# EAGLE board testv3 (EAGLE 6.3)
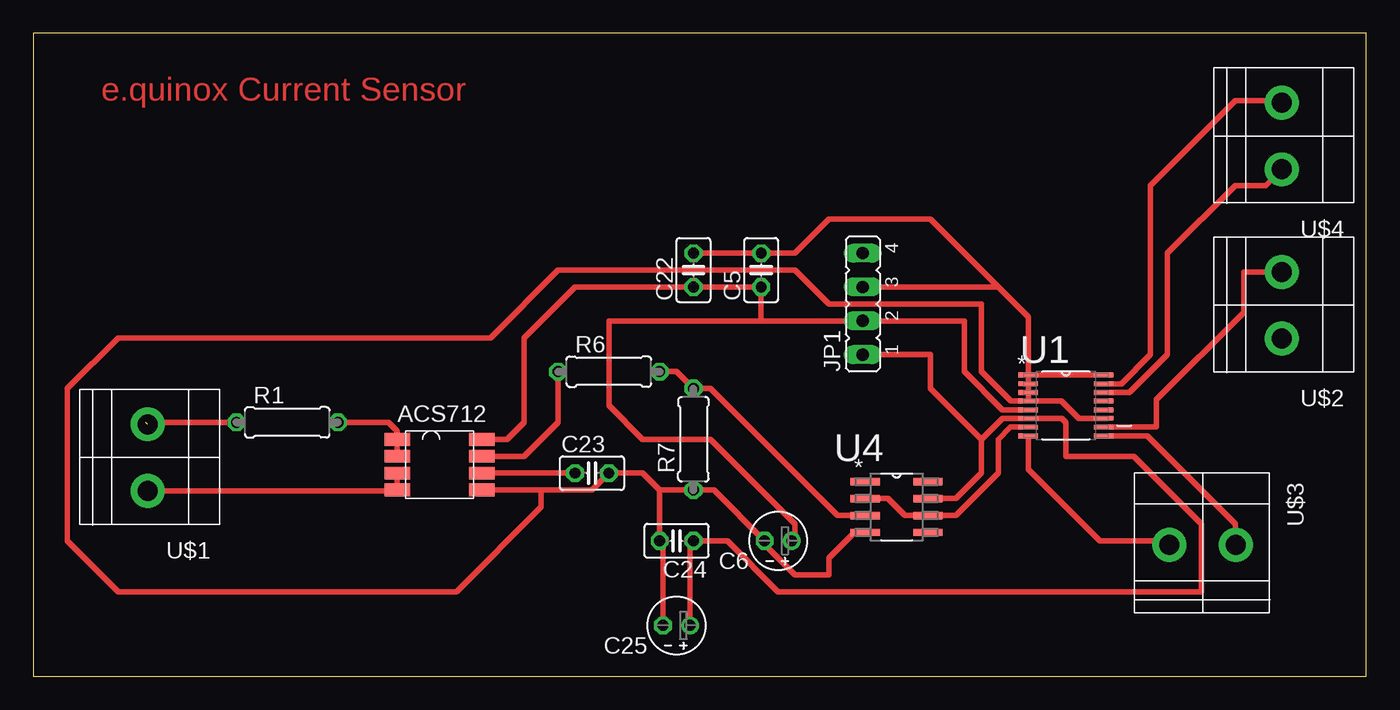
[diagram p0: board, top side]

Size 100 x 48.25 mm. Coordinates in mm from the lower left corner, seen from the top.
Outline: 0,0 100,0 100,48.25 0,48.25 0,0
Copper layers (1*16): Top 0.035mm / dielectric 1.5mm / Bottom 0.035mm
Design rules "default": minimum track width 10mil, minimum drill 24mil, track to track 8mil, track to pad 8mil, pad to pad 8mil, via to via 8mil, smd to smd 8mil, copper to edge 40mil, drill to drill 8mil, minimum pad ring 10mil, minimum via ring 8mil, stop-mask expansion 4mil, vias tented up to drill 0mil, thermal gap 10mil

## Footprints (pad centres in the part's own frame; a part is rotated, then mirrored left to right if it is on the bottom)
C025-025X050 = drill 0.813 octagon: 1 -1.27,0; 2 1.27,0
E2-4 = drill 0.813 pad 1.27: + -1.016,0 | drill 0.813 pad 1.27 octagon: - 1.016,0
JP4 = drill 0.914 long: 1 -3.81,0; 2 -1.27,0; 3 1.27,0; 4 3.81,0
0207/7 = drill 0.813 octagon: 1 -3.81,0; 2 3.81,0
SOP65P640X120-16N = smd 1.473 x 0.356: 1 -2.819,2.286; 2 -2.819,1.626; 3 -2.819,0.965; 4 -2.819,0.33; 5 -2.819,-0.33; 6 -2.819,-0.965; 7 -2.819,-1.626; 8 -2.819,-2.286; 9 2.819,-2.286; 10 2.819,-1.626; 11 2.819,-0.965; 12 2.819,-0.33; 13 2.819,0.33; 14 2.819,0.965; 15 2.819,1.626; 16 2.819,2.286
SOIC127P600X175-8N = smd 2.184 x 0.559: 1 -2.362,1.905; 2 -2.362,0.635; 3 -2.362,-0.635; 4 -2.362,-1.905; 5 2.362,-1.905; 6 2.362,-0.635; 7 2.362,0.635; 8 2.362,1.905
CTB1500-2 = drill 1.5 pad 2.54: P$1 2.481,5.396; P$2 7.481,5.396
SOIC8 = smd 1.93 x 0.965: 1 -4.445,1.27; 2 -4.445,0; 3 -4.445,-1.27; 4 -4.445,-2.54; 5 1.905,-2.54; 6 1.905,-1.27; 7 1.905,0; 8 1.905,1.27

## Placement (x,y rotation side)
C5  [C025-025X050]  54.61,30.48 90 top
C6  [E2-4]  55.88,10.16 180 top
C22  [C025-025X050]  49.53,30.48 90 top
C23  [C025-025X050]  41.91,15.24 0 top
C24  [C025-025X050]  48.26,10.16 180 top
C25  [E2-4]  48.26,3.81 180 top
JP1  [JP4]  62.23,27.94 90 top
R1  [0207/7]  19.05,19.05 0 top
R6  [0207/7]  43.18,22.86 0 top
R7  [0207/7]  49.53,17.78 90 top
U1  AD7993BRUZ-0  [SOP65P640X120-16N]  77.47,20.32 0 top
U4  MCP601-E/SN  [SOIC127P600X175-8N]  64.77,12.7 0 top
U$1  CTB1500/2  [CTB1500-2]  13.97,11.43 90 top
U$2  CTB1500/2  [CTB1500-2]  99.06,22.86 90 top
U$3  CTB1500/2  [CTB1500-2]  92.71,15.24 180 top
U$4  CTB1500/2  [CTB1500-2]  99.06,35.56 90 top
U$10  ACS712  [SOIC8]  31.75,16.51 0 top

## Library data of the parts
C5 C6 C22-C25 R1 R6 R7 = resistor
JP1 = jumper
U1 = ADC; MPN: AD7993BRUZ-0; OC_FARNELL: 1078309; OC_NEWARK: 59K6101; PACKAGE: TSSOP-16; SUPPLIER: Analog Devices
U4 = mcp; MPN: MCP601-E/SN; OC_FARNELL: 1852039; OC_NEWARK: 88H9865; PACKAGE: SOIC-8; SUPPLIER: Microchip
U$1-U$4 = eko-parts
U$10 = Pauls_parts

## Nets
+3V3: C24.1 C25.+ JP1.1 U1.6 U4.7
+5V: C5.1 C6.+ C22.1 JP1.2 U1.5 U$10.8
GND: C5.2 C6.- C22.2 C23.2 C24.2 C25.- JP1.3 R7.1 U1.1 U1.2 U1.3 U1.4 U1.11 U1.16 U4.4 U$10.5
IDC_OUT: U1.7 U4.2 U4.6
N$1: U1.9 U$3.P$1
N$2: U1.8 U$3.P$2
N$3: R1.1 U$1.P$2
N$8: R1.2 U$10.1 U$10.2
N$26: U$1.P$1 U$10.3 U$10.4
N$27: R6.1 U$10.7
N$28: C23.1 U$10.6
N$29: R6.2 R7.2 U4.3
N$30: U1.14 U$4.P$1
SCL: U1.15 U$4.P$2
VDC_OUT: U1.10 U$2.P$2

## Tracks (layer width: path | path; a pad name or v marks a point on that pad's centre or on a via)
+3V3
  Top 0.406: C25.+ 49.28,9.91 C24.1 52.07,10.16 55.88,6.35 87.63,6.35 87.63,11.43 82.55,16.51 77.47,16.51 77.47,19.05 77.17,19.36 U1.6 72.69,19.36 71.12,17.78 | U4.7 69.22,13.34 71.12,15.24 71.12,17.78 | JP1.1 67.31,24.13 67.31,21.59 71.12,17.78
+5V
  Top 0.406: U$10.8 35.56,17.78 36.83,19.05 36.83,25.4 40.64,29.21 C22.1 C5.1 54.61,26.67 | U1.5 72.72,19.99 69.85,22.86 69.85,26.67 JP1.2 54.61,26.67 | 54.61,26.67 43.18,26.67 43.18,20.32 45.72,17.78 50.8,17.78 57.15,11.43 57.15,10.41 C6.+
GND
  Top 0.406: U1.4 U1.3 U1.2 U1.1 | U$10.5 38.1,13.97 | 38.1,13.97 41.91,13.97 C23.2 45.72,15.24 46.99,13.97 | C22.2 C5.2 57.15,31.75 59.69,34.29 67.31,34.29 72.39,29.21 | 46.99,13.97 R7.1 51.05,13.97 C6.- 54.86,9.91 57.15,7.62 59.69,7.62 59.69,8.89 61.59,10.79 U4.4 | 46.99,13.97 C24.2 47.24,9.91 C25.- | JP1.3 72.39,29.21 | U1.1 74.65,26.95 72.39,29.21 | U1.11 78.44,19.36 77.14,20.65 U1.4 | U1.1 U1.16 | U1.4 73.33,20.65 71.12,22.86 71.12,27.94 59.69,27.94 57.15,30.48 39.37,30.48 34.29,25.4 6.35,25.4 2.54,21.59 2.54,10.16 6.35,6.35 31.75,6.35 38.1,12.7 38.1,13.97
IDC_OUT
  Top 0.406: U4.2 64.14,13.34 65.41,12.06 U4.6 69.22,12.06 72.39,15.24 72.39,17.78 73.3,18.69 U1.7
N$1
  Top 0.406: 83.03,18.03 U1.9 83.57,18.03 90.17,11.43 90.17,9.9 U$3.P$1
N$2
  Top 0.406: U1.8 74.65,15.52 80.01,10.16 84.36,10.16 84.91,10.16 U$3.P$2
N$3  (1 unrouted)
  Top 0.406: R1.1 8.43,19.05
N$8
  Top 0.406: U$10.2 U$10.1 27.3,18.41 26.67,19.05 R1.2
N$26
  Top 0.406: 27.27,14.01 U$10.4 | U$10.4 U$10.3 | U$1.P$1 27.3,13.91 U$10.4
N$27
  Top 0.406: U$10.7 36.83,16.51 39.37,19.05 R6.1
N$28
  Top 0.406: U$10.6 C23.1
N$29
  Top 0.406: R6.2 48.26,22.86 R7.2 50.8,21.59 60.33,12.06 U4.3
N$30
  Top 0.406: U1.14 82.25,21.29 85.09,24.13 85.09,31.75 90.17,36.83 92.45,36.83 U$4.P$1
SCL
  Top 0.406: U1.15 81.64,21.95 83.82,24.13 83.82,36.83 90.17,43.18 93.53,43.18 U$4.P$2
VDC_OUT
  Top 0.406: U1.10 84.27,18.69 84.27,20.77 90.81,27.3 90.81,30.34 U$2.P$2

## Text on the board
Top: e.quinox Current Sensor